# Altium PCB MIPI_To_HDMI.PcbDoc
Units mm, origin at the board's own origin, x right, y up, seen from the top; angles counter-clockwise.
Board outline 60 x 15 mm, 2 copper layers (Top Layer, Bottom Layer); 28 components, 27 nets, 132 pads, 38 vias.
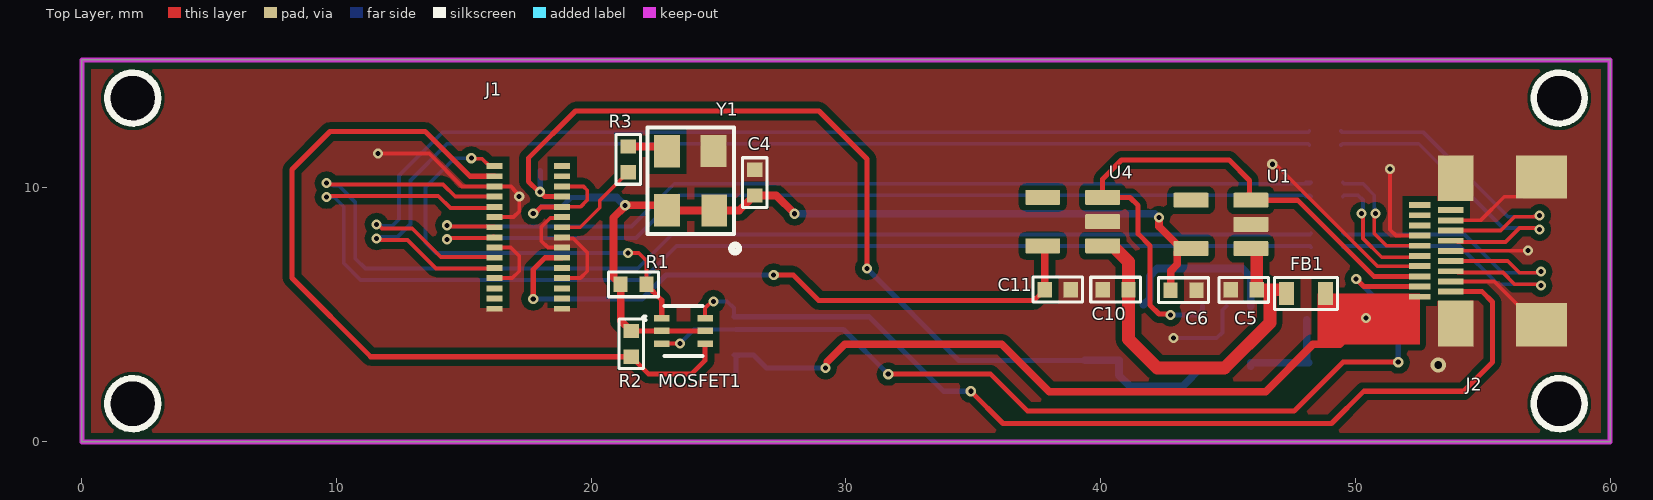
[diagram p0: Top Layer view]
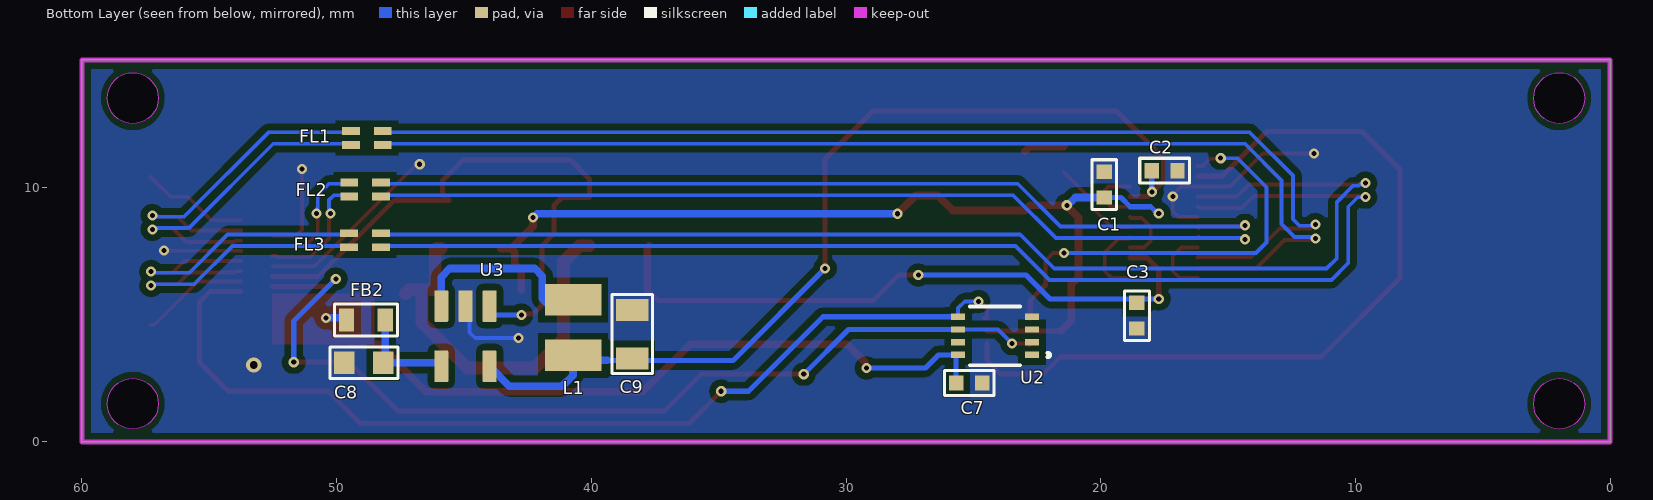
[diagram p1: Bottom Layer view, seen from below]
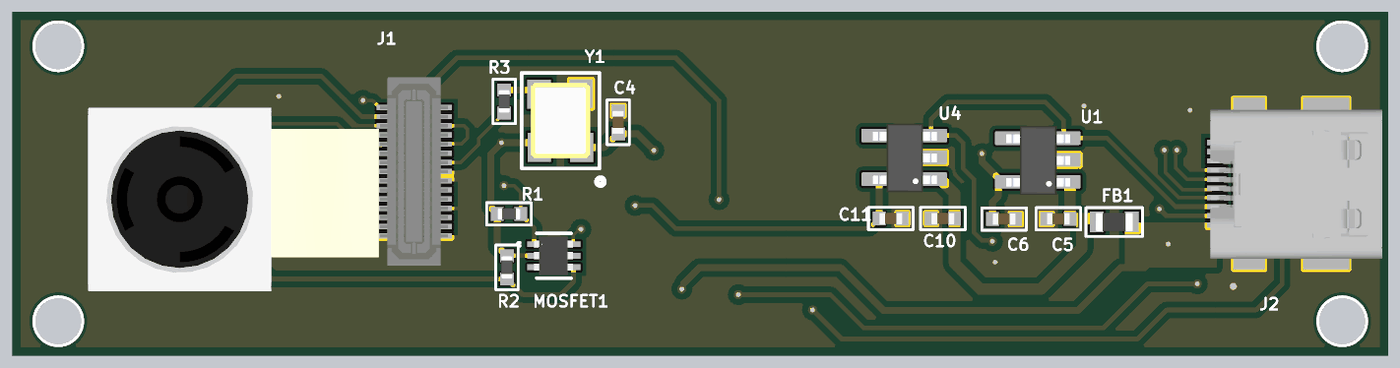
[diagram p2: 3D render of the assembled board from above, using the file's embedded part models]
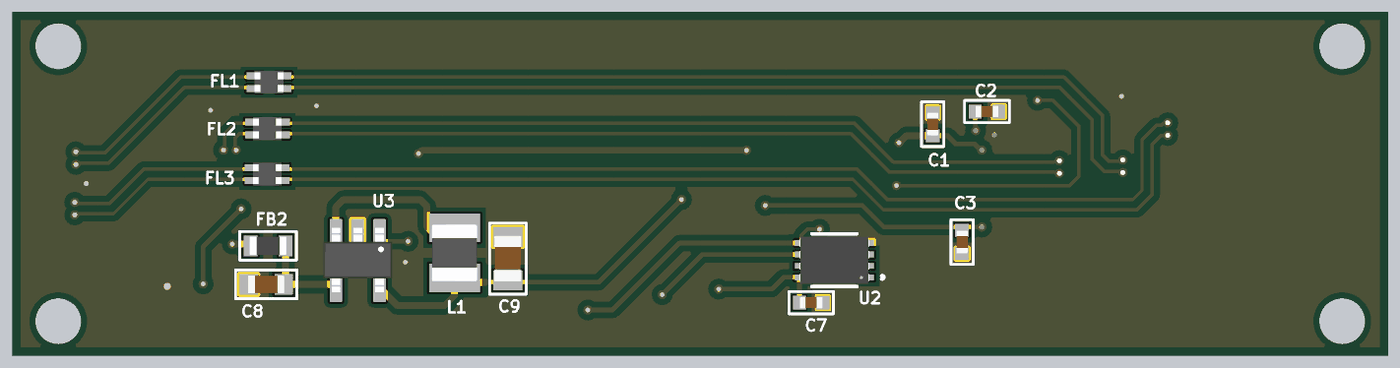
[diagram p3: 3D render of the assembled board from below, using the file's embedded part models]

## Layer stack, top to bottom
Top Solder: solder mask 0.0102, Solder Resist, Dk 3.5
Top Layer: signal copper 0.0356
Dielectric 1: dielectric 0.32, FR-4, Dk 4.8
Bottom Layer: signal copper 0.0356
Bottom Solder: solder mask 0.0102, Solder Resist, Dk 3.5

## Board outline
0,0 60,0 60,15 0,15
cut-out: 57,1.5 ccw(c58,1.5) 58,0.5 ccw(c58,1.5) 59,1.5 ccw(c58,1.5) 58,2.5 ccw(c58,1.5)
cut-out: 57,13.5 ccw(c58,13.5) 58,12.5 ccw(c58,13.5) 59,13.5 ccw(c58,13.5) 58,14.5 ccw(c58,13.5)
cut-out: 1,1.5 ccw(c2,1.5) 2,0.5 ccw(c2,1.5) 3,1.5 ccw(c2,1.5) 2,2.5 ccw(c2,1.5)
cut-out: 1,13.5 ccw(c2,13.5) 2,12.5 ccw(c2,13.5) 3,13.5 ccw(c2,13.5) 2,14.5 ccw(c2,13.5)

## Design rules (kind name [scope] priority, off if disabled: settings)
Clearance Clearance_1 [InPoly] p1: gap=0.254 ignorepadtopadclearanceinfootprint=TRUE
Clearance [All] p2: gap=0.15 ignorepadtopadclearanceinfootprint=TRUE
DiffPairsRouting [All] p1: maxlimit=1 minlimit=0.15 mostfreqgap=0.3 substack1={A68E8B82-1F49-4FB9-9444-1953C41FB96C} toplayer_{a68e8b82-1f49-4fb9-9444-1953c41fb96c}_prefgap=0.254 toplayer_{a68e8b82-1f49-4fb9-9444-1953c41fb96c}_minwidth=0.15 toplayer_{a68e8b82-1f49-4fb9-9444-1953c41fb96c}_maxwidth=0.381 toplayer_{a68e8b82-1f49-4fb9-9444-1953c41fb96c}_prefwidth=0.15 bottomlayer_{a68e8b82-1f49-4fb9-9444-1953c41fb96c}_prefgap=0.254 bottomlayer_{a68e8b82-1f49-4fb9-9444-1953c41fb96c}_minwidth=0.15 bottomlayer_{a68e8b82-1f49-4fb9-9444-1953c41fb96c}_maxwidth=0.381 bottomlayer_{a68e8b82-1f49-4fb9-9444-1953c41fb96c}_prefwidth=0.15 toplayer_minwidth=0.15 toplayer_maxwidth=0.381 toplayer_prefwidth=0.15 bottomlayer_minwidth=0.15 bottomlayer_maxwidth=0.381 bottomlayer_prefwidth=0.15 substack2={EB61043C-BB84-4B0D-A59E-0C1C5B324672} toplayer_{eb61043c-bb84-4b0d-a59e-0c1c5b324672}_mingap=0.254 toplayer_{eb61043c-bb84-4b0d-a59e-0c1c5b324672}_maxgap=0.254 toplayer_{eb61043c-bb84-4b0d-a59e-0c1c5b324672}_prefgap=0.254 toplayer_{eb61043c-bb84-4b0d-a59e-0c1c5b324672}_minwidth=0.15 toplayer_{eb61043c-bb84-4b0d-a59e-0c1c5b324672}_maxwidth=0.381 toplayer_{eb61043c-bb84-4b0d-a59e-0c1c5b324672}_prefwidth=0.2 bottomlayer_{eb61043c-bb84-4b0d-a59e-0c1c5b324672}_mingap=0.254 bottomlayer_{eb61043c-bb84-4b0d-a59e-0c1c5b324672}_maxgap=0.254 bottomlayer_{eb61043c-bb84-4b0d-a59e-0c1c5b324672}_prefgap=0.254 bottomlayer_{eb61043c-bb84-4b0d-a59e-0c1c5b324672}_minwidth=0.15 bottomlayer_{eb61043c-bb84-4b0d-a59e-0c1c5b324672}_maxwidth=0.381 bottomlayer_{eb61043c-bb84-4b0d-a59e-0c1c5b324672}_prefwidth=0.2 maxuncoupledlength=12.7
HoleSize [All] p1: absolutevalues=TRUE maxlimit=10 minlimit=0.025 maxpercent=80.000 minpercent=20.000
PolygonConnect [All] p1: connectstyle=Direct reliefconductorwidth=0.254 reliefentries=4 polygonreliefangle="90 Angle" airgapwidth=0.254
RoutingVias [All] p1: holewidth=0.2 width=0.4 viastyle="Through Hole" minholewidth=0.2 minwidth=0.4 maxholewidth=0.4 maxwidth=1
SolderMaskExpansion [All] p1: expansion=0.102
Width [All] p1: maxlimit=3 minlimit=0.15 preferedwidth=0.254
28 further rules are at their usual default settings.

## Classes and differential pairs
differential pair MIPI_D1: +MIPI_D1_P -MIPI_D1_N
differential pair MIPI_D0: +MIPI_D0_P -MIPI_D0_N
differential pair MIPI_CLK: +MIPI_CLK_P -MIPI_CLK_N
differential pair HDMI_MIPI_D1: +HDMI_MIPI_D1_P -HDMI_MIPI_D1_N
differential pair HDMI_MIPI_D0: +HDMI_MIPI_D0_P -HDMI_MIPI_D0_N
differential pair HDMI_MIPI_CLK: +HDMI_MIPI_CLK_P -HDMI_MIPI_CLK_N

## Components (designator, comment, footprint, x,y, rotation, side; value= is the part's Value field where it differs from the comment)
C1 "1uF" CAP-0402 19.86,9.594 r90 bottom
C2 "1uF" CAP-0402 18,10.65 r180 bottom
C3 "1uF" CAP-0402 18.58,5.466 r270 bottom
C4 "1uF" CAP-0402 26.42,9.674 r90 top
C5 "1uF" CAP-0402 46.126,5.97 r180 top
C6 "1uF" CAP-0402 42.744,5.96 r0 top
C7 "100nF" CAP-0402 25.67,2.31 r180 bottom
C8 "4.7uF" CAP-0603 48.93,3.11 r0 bottom
C9 "10uF" CAP-0805-S 38.392,4.232 r90 bottom
C10 "1uF" CAP-0402 41.092,5.98 r180 top
C11 "1uF" CAP-0402 37.804,5.98 r0 top
FB1 "BLM18AG601SN1" FBD-0603-S 48.06,5.83 r180 top
FB2 "BLM18AG601SN1" FBD-0603-S 48.85,4.79 r180 bottom
FL1 "DLP11SN900HL2L" DLP11SN900HL2L 48.81,11.93 r180 bottom
FL2 "DLP11SN900HL2L" DLP11SN900HL2L 48.88,9.91 r180 bottom
FL3 "DLP11SN900HL2L" DLP11SN900HL2L 48.887,7.918 r180 bottom
J1 "DF37NC30DS04V51" DF37NC30DS04V51 17.53,8.03 r90 top
J2 "Micro HDMI" HDMI-0467650301 55.35,7.5 r90 top
L1 "2.2uH" IND-1008 40.717,4.486 r270 bottom
MOSFET1 "DMG1024UV-7" SOT-563_DIO 23.594,4.24 r0 top
R1 "2.2K" RES-0402 21.15,6.185 r0 top
R2 "2.2K" RES-0402 21.57,4.359 r270 top
R3 "22R" RES-0402 21.45,11.6 r270 top
U1 "AP7331-18WG" AP7331-sot-25 44.721,8.54 r180 top
U2 "ATSHA204A-MAHCZ-" ATSHA204A 24.175,4.233 r0 bottom
U3 "PAM2301CAAB120" PAM2301CAAB120 44.94,4.15 r270 bottom
U4 "AP7331-28WG" AP7331-sot-25 38.901,8.65 r180 top
Y1 "24MHz" 3225-OSC 23.9,10.33 r90 top

## Footprints (in the part's own frame and the unit in brackets; to place one, negate y for a bottom-side part, rotate by r counter-clockwise, add the part's x,y. Pads: shape width x height; smd on the part's side, far side on the other; paste and mask are expansions set on the pad)
3225-OSC [mil]
  rect 50x40 smd: 1(-48.89,-36.56) 2(42.98,-35.31) 3(42.67,36.56) 4(-48.58,36.25)
  silkscreen extent -114,-74 79,67, body extent -68,-51 62,51, height 31
AP7331-sot-25 [mm]
  rrect15% 1.37x0.59 smd: 1(-1.175,0.95) 2(-1.175,0) 3(-1.175,-0.95) 4(1.175,-0.95) 5(1.175,0.95)
  body extent -1.42,-1.47 1.38,1.53, height 1.31
ATSHA204A [mil]
  rect 22x10 smd: 1(-58.06,32.24) 2(-58.06,12.56) 3(-58.06,-7.13) 4(-58.06,-26.81) 5(56.02,-26.81) 6(56.02,-7.13) 7(56.02,12.56) 8(56.02,32.24)
  silkscreen extent -86,-43 38,48, body extent -61,-37 59,43, height 19
CAP-0402 [mm]
  rect 0.56x0.6 smd mask+0.07: 1(0,0) 2(1.016,0)
  silkscreen extent -0.47,-0.49 1.48,0.49, body extent 0.01,-0.25 1.01,0.25, height 0.49
CAP-0603 [mm]
  rect 0.8x0.9 smd: 1(-0.762,0) 2(0.762,0)
  silkscreen extent -1.34,-0.63 1.34,0.63, body extent -0.8,-0.4 0.8,0.4, height 0.6
CAP-0805-S [mm]
  rect 0.862x1.27 smd: 1(-0.95,0) 2(0.95,0)
  silkscreen extent -1.55,-0.8 1.55,0.8, body extent -1,-0.6 1,0.6, height 0.95
DF37NC30DS04V51 [mm]
  rect 0.23x0.63 smd: 1(2.8,-1.325) 2(2.4,-1.325) 3(2,-1.325) 4(1.6,-1.325) 5(1.2,-1.325) 6(0.8,-1.325) 7(0.4,-1.325) 8(0,-1.325) 9(-0.4,-1.325) 10(-0.8,-1.325) 11(-1.2,-1.325) 12(-1.6,-1.325) 13(-2,-1.325) 14(-2.4,-1.325) 15(-2.8,-1.325) 16(-2.8,1.325) 17(-2.4,1.325) 18(-2,1.325) 19(-1.6,1.325) 20(-1.2,1.325) 21(-0.8,1.325) 22(-0.4,1.325) 23(0,1.325) 24(0.4,1.325) 25(0.8,1.325) 26(1.2,1.325) 27(1.6,1.325) 28(2,1.325) 29(2.4,1.325) 30(2.8,1.325)
  body extent -5.21,-1.75 10.65,14.23, height 6.76
DLP11SN900HL2L [mm]
  rect 0.7x0.3 smd: 1(-0.625,0.275) 2(0.625,0.275) 3(0.625,-0.275) 4(-0.625,-0.275)
  body extent -0.62,-0.5 0.63,0.5, height 0.93
FBD-0603-S [mm]
  rect 0.6x0.9 smd: 1(-0.762,0) 2(0.762,0)
  silkscreen extent -1.24,-0.63 1.24,0.63, body extent -0.8,-0.4 0.8,0.4, height 0.79
HDMI-0467650301 [mm]
  rect 0.23x0.85 smd: 1(1.8,2.825) 3(1.4,2.825) 5(1,2.825) 7(0.6,2.825) 9(0.2,2.825) 11(-0.2,2.825) 13(-0.6,2.825) 15(-1,2.825) 17(-1.4,2.825) 19(-1.8,2.825)
  rect 0.23x1 smd: 2(1.6,1.6) 4(1.2,1.6) 6(0.8,1.6) 8(0.4,1.6) 10(0,1.6) 12(-0.4,1.6) 14(-0.8,1.6) 16(-1.2,1.6) 18(-1.6,1.6)
  rect 1.8x1.38 smd: 20(-2.85,1.41) 21(2.85,1.41)
  rect 1.7x2 smd: 22(-2.9,-1.95) 23(2.9,-1.95)
  body extent -3.28,-4.4 3.22,3.1, height 2.98
IND-1008 [mm]
  rect 1.24x2.22 smd: 1(-1.09,0) 2(1.09,0)
  body extent -1.25,-1 1.25,1, height 0.99
PAM2301CAAB120 [mm]
  rrect14% 1.24x0.55 smd: 1(-1.185,0.95) 2(-1.185,0) 3(-1.185,-0.95) 4(1.185,-0.95) 5(1.185,0.95)
  body extent -1.42,-1.5 1.38,1.5, height 1.31
RES-0402 [mm]
  rect 0.56x0.6 smd mask+0.07: 1(0,0) 2(1.016,0)
  silkscreen extent -0.47,-0.49 1.48,0.49, body extent 0.01,-0.25 1.01,0.25, height 0.37
SOT-563_DIO [mil]
  rect 24x10 smd: 1(-32.56,24.37) 2(-32.56,4.68) 3(-32.56,-15) 4(34.44,-15) 5(34.44,4.68) 6(34.44,24.37)
  silkscreen extent -61,-34 30,43, body extent -34,-29 34,38, height 24

## Part data
C1 C2 C3 C4 C5 C6 C7 C8 C9 C10 C11: library part CAP, "Capacitor"
FB1 FB2 L1: library part INDUCTOR, "Inductor"
FL1 FL2 FL3: Package=FIL_DLP11SN900HL2L, DeviceSetName=DLP11SN900HL2L, Digi-Key_Part_Number=490-5143-1-ND, GateName_1=G$1, LibraryName=DLP11SN900HL2L, MF=Murata, Mouser-Purchase-URL=https://snapeda.com/shop?store=Mouser&id=4300514, MP=DLP11SN900HL2L, SymbolName_1=DLP11SN900HL2L
J2: library part HDMI-0467650301, Manufacturer_Name=Molex, Manufacturer_Part_Number=0467650301, Arrow_Part_Number=0467650301, Arrow_Price-Stock=https://www.arrow.com/en/products/0467650301/molex, DeviceSetName=0467650301, GateName_1=G$1, Height=3mm, LibraryName=0467650301, Package=0467650301, SymbolName_1=0467650301
R1 R2 R3: library part RES
U1 U4: library part AP7331-xxWG-7, Package=SOT95P285X145-5N, DeviceSetName=AP7331-18WG-7, Digi-Key_Part_Number=AP7331-18WG-7DICT-ND, GateName_1=G$1, LibraryName=AP7331-18WG-7, MF="Diodes Inc.", Mouser-Purchase-URL=https://snapeda.com/shop?store=Mouser&id=494406, MP=AP7331-18WG-7, SymbolName_1=AP7331-18WG-7
U2: Manufacturer_Part_Number=ATSHA204A-MAHCZ-T, Built_By=EMA_Molly, Copyright="Copyright (C) 2018 Accelerated Designs. All rights reserved", SourceLibrary=Microchip_2019-08-23_25, Vendor=Microchip
U3: Package=SOT95P280X100-5N, DeviceSetName=PAM2301CAAB120, Digi-Key_Part_Number=PAM2301CAAB120DI-ND, GateName_1=G$1, LibraryName=PAM2301CAAB120, MF="Diodes Inc.", MP=PAM2301CAAB120, SymbolName_1=PAM2301CAAB120
Y1: library part OSC-3225
MOSFET1: Built_By=EMA_Cory, C="Copyright (C) 2018 Accelerated Designs. All rights reserved", Copyright="Copyright (C) 2018 Accelerated Designs. All rights reserved", Datasheet=https://www.diodes.com/assets/Datasheets/ds31974.pdf, Manufacturer_Part_Number=DMG1024UV-7, SourceLibrary=Diodes_Inc_2020-03-09, Vendor="Diodes Inc"

## Via types
v1: diameter 0.4, hole 0.2, Top Layer to Bottom Layer, tented both sides, 37 vias
v2: diameter 0.6, hole 0.3, Top Layer to Bottom Layer, tented both sides, 1 vias

## Nets (pads, with @x,y where several pads share a name; then routed paths per layer and width w, separated by ;. In a path a pad name is that pad's centre, name@x,y a point inside that pad or via, vN(x,y) a via of type N, cw(c..) or ccw(c..) an arc to the next point about the centre after c; other vN are vias at no path point)
1V2: C2.1 C9.1 J1.4 L1.2 U3.5 | length 38.2
  Top Layer w0.2: J1.4 18.18,9.63 v1(17.99,9.82) 17.936,9.82 17.53,10.226 17.53,11.14 19.38,12.99 28.94,12.99 30.82,11.11 v1(30.82,6.81)
  Bottom Layer w0.2: v1(17.99,9.82) 17.995,9.825 17.995,10.645 C2.1 ; v1(30.82,6.81) 34.43,3.2 39.37,3.2
  Bottom Layer w0.3: 39.37,3.2 40.717,3.2 40.717,2.623 41.15,2.19 43.215,2.19 U3.5
1V8: C1.1 C4.1 C6.1 J1.3 J1.5 MOSFET1.2 MOSFET1.5 R1.1 R2.1 U1.5 Y1.1 Y1.4 | length 41.5
  Top Layer w0.15: J1.5 19.57,9.23 19.84,9.5 19.84,9.88 19.69,10.03 J1.3
  Top Layer w0.2: v1(17.72,8.97) 17.774,8.97 18.034,9.23 J1.5 ; R2.1 22.767,4.359 MOSFET1.5
  Top Layer w0.3: R2.1 21.55,4.359 21.15,4.759 R1.1 20.87,6.465 20.87,8.803 21.33,9.263 v1(21.33,9.29) 22.785,9.29 Y1.4 22.987,9.088 Y1.1 25.814,9.088 26.4,9.674 C4.1 27.266,9.674 v1(27.98,8.96) ; v1(42.286,8.815) 42.286,8.46 U1.5@43.156,7.59 ; C6.1 42.744,6.71 43.011,6.977 43.011,7.445 U1.5@43.156,7.59 ; U1.5 U1.5@43.156,7.59
  Bottom Layer w0.2: v1(17.72,8.97) 17.774,8.97 18.038,9.234 18.844,9.234 19.204,9.594 C1.1
  Bottom Layer w0.3: C1.1 20.999,9.594 21.303,9.29 v1(21.33,9.29) ; v1(27.98,8.96) 42.114,8.96 42.259,8.815 v1(42.286,8.815)
2V8: C3.1 C11.1 J1.10 U4.5 | length 25.3
  Top Layer w0.2: v1(17.72,5.613) 17.72,6.77 18.18,7.23 J1.10 ; v1(27.16,6.55) 27.93,6.55 28.93,5.55 37.374,5.55 37.604,5.78 37.624,5.78 37.804,5.96 C11.1
  Top Layer w0.3: U4.5 37.804,7.622 C11.1
  Bottom Layer w0.2: v1(17.72,5.613) 21.994,5.613 22.931,6.55 v1(27.16,6.55)
3V3: C7.1 FB1.1 FB2.1 J2.19 U2.8 | length 29
  Top Layer w0.3: 29.27,3.15 29.956,3.836 36.115,3.836 37.977,1.974 46.472,1.974 48.334,3.836 49.376,3.836 v1(50.41,4.87)
  Bottom Layer w0.2: U2.8 U2.8@25.674,3.414 ; C7.1@25.676,2.49 25.674,2.492 U2.8@25.674,3.414 ; U2.8@25.808,3.404 U2.8@25.81,3.402 ; v1(29.195,2.903) 26.879,2.903 26.368,3.414 25.808,3.414 U2.8@25.674,3.414
  Bottom Layer w0.3: FB2.1 49.692,4.87 v1(50.41,4.87)
ENABLE: J2.15 U1.3 U3.1 U4.3 | length 24.3
  Top Layer w0.2: v1(42.744,4.986) 42.706,5.024 42.286,5.024 41.939,5.371 41.939,7.7 41.47,8.169 41.47,9.28 41.15,9.6 U4.3 40.076,10.327 40.815,11.066 45.044,11.066 45.846,10.264 45.846,9.751 45.585,9.49 U1.3 47.733,9.49 50.723,6.5 J2.15
  Bottom Layer w0.2: v1(42.744,4.986) 43.815,4.986 43.99,5.161 U3.1
GND: C1.2 C2.2 C3.2 C4.2 C5.2 C6.2 C7.2 C8.2 C9.2 C10.2 C11.2 J1.6 J1.8 J1.9 J1.12 J1.15 J1.16 J1.19 J1.22 J1.25 J1.28 J2.4 J2.7 J2.10 J2.13 J2.16 J2.20 J2.21 J2.22 J2.23 U1.2 U2.4 U3.2 U4.2 Y1.2 | length 42
  Top Layer w0.15: v1(11.621,11.32) 13.638,11.32 14.928,10.03 J1.28 16.856,10.03 16.952,9.934 16.952,9.914 17.169,9.698 v1(17.169,9.63) 17.169,9.047 16.952,8.83 J1.25 ; J1.19 16.897,6.43 17.169,6.702 17.169,7.298 16.837,7.63 J1.22 ; J1.12 19.57,6.43 19.84,6.7 19.84,7.44 19.29,7.99 18.895,7.99 J1.8 ; J1.9 18.295,7.63 18.034,7.891 18.034,8.433 18.391,8.79 18.815,8.79 J1.6 ; v1(46.738,10.9) 46.86,10.9 50.86,6.9 J2.13 ; v1(51.36,10.71) 51.36,8.33 51.59,8.1 J2.7 ; J2.16 55.45,6.3 57.15,4.6 J2.22 ; J2.10 53.755,7.505 56.775,7.505 v1(56.78,7.51) ; J2.4 54.916,8.7 55.841,9.625 56.525,9.625 J2.23
  Bottom Layer w0.15: v1(42.861,4.079) 44.557,4.079 44.779,4.301 44.779,5.173 U3.2
  other v2: 53.25,3.021
HDMI_MIPI_CLK_N: FL3.4 J2.14 | length 12.2
  Top Layer w0.15: J2.14 53.979,6.7 54.029,6.65 55.791,6.65 56.251,6.19 57.067,6.19 57.069,6.188 57.232,6.188 v1(57.28,6.14)
  Bottom Layer w0.15: FL3.4 49.562,7.693 54.091,7.693 55.594,6.19 57.067,6.19 57.069,6.188 57.232,6.188 v1(57.28,6.14)
HDMI_MIPI_CLK_P: FL3.1 J2.12 | length 12.2
  Top Layer w0.15: J2.12 55.978,7.1 56.438,6.64 57.067,6.64 57.069,6.642 57.232,6.642 v1(57.28,6.69)
  Bottom Layer w0.15: FL3.1 49.562,8.143 54.277,8.143 55.78,6.64 57.067,6.64 57.069,6.642 57.232,6.642 v1(57.28,6.69)
HDMI_MIPI_D0_N: FL2.4 J2.11 | length 5
  Top Layer w0.15: v1(50.242,8.97) 50.29,8.922 50.29,8.817 50.292,8.815 50.292,7.992 51.034,7.25 52.321,7.25 52.371,7.3 J2.11
  Bottom Layer w0.15: FL2.4 49.555,9.685 50.106,9.685 50.292,9.499 50.292,9.183 50.29,9.181 50.29,9.018 v1(50.242,8.97)
HDMI_MIPI_D0_P: FL2.1 J2.9 | length 5
  Top Layer w0.15: v1(50.792,8.97) 50.744,8.922 50.744,8.817 50.742,8.815 50.742,8.178 51.22,7.7 51.999,7.7 J2.9
  Bottom Layer w0.15: FL2.1 49.555,10.135 50.292,10.135 50.742,9.685 50.742,9.183 50.744,9.181 50.744,9.018 v1(50.792,8.97)
HDMI_MIPI_D1_N: FL1.4 J2.8 | length 13
  Top Layer w0.15: J2.8 53.979,7.9 54.029,7.85 55.893,7.85 56.436,8.393 57.019,8.393 57.021,8.391 57.184,8.391 v1(57.232,8.343)
  Bottom Layer w0.15: FL1.4 49.485,11.705 52.489,11.705 55.8,8.393 57.019,8.393 57.021,8.391 57.184,8.391 v1(57.232,8.343)
HDMI_MIPI_D1_P: FL1.1 J2.6 | length 12.9
  Top Layer w0.15: J2.6 55.706,8.3 56.249,8.843 57.019,8.843 57.021,8.845 57.184,8.845 v1(57.232,8.893)
  Bottom Layer w0.15: FL1.1 49.485,12.155 52.675,12.155 55.987,8.843 57.019,8.843 57.021,8.845 57.184,8.845 v1(57.232,8.893)
MCLK: J1.7 R3.2 | length 3.7
  Top Layer w0.15: J1.7 19.565,8.43 20.33,9.195 20.33,9.484 21.43,10.584 R3.2
MIPI_CLK_N: FL3.3 J1.26 | length 48.7
  Top Layer w0.15: v1(9.61,9.61) 9.658,9.658 9.821,9.658 9.823,9.66 10.67,9.66 13.991,9.66 14.471,9.18 16.111,9.18 16.161,9.23 J1.26
  Bottom Layer w0.15: v1(9.61,9.61) 9.614,9.606 9.907,9.606 10.28,9.234 10.28,7.024 10.944,6.36 22.01,6.36 23.343,7.693 48.212,7.693 FL3.3
MIPI_CLK_P: FL3.2 J1.27 | length 48.7
  Top Layer w0.15: v1(9.61,10.16) 9.658,10.112 9.821,10.112 9.823,10.11 10.856,10.11 14.177,10.11 14.657,9.63 J1.27
  Bottom Layer w0.15: v1(9.61,10.16) 9.658,10.112 9.821,10.112 9.877,10.056 10.094,10.056 10.73,9.42 10.73,7.21 11.13,6.81 21.824,6.81 23.157,8.143 48.212,8.143 FL3.2
MIPI_D0_N: FL2.3 J1.23 | length 36.8
  Top Layer w0.15: v1(14.335,7.955) 14.383,8.003 14.546,8.003 14.548,8.005 14.768,8.005 16.18,8.005 J1.23 J1.23@16.165,8.07
  Bottom Layer w0.15: v1(14.335,7.955) 14.383,8.003 14.546,8.003 14.548,8.005 21.761,8.005 23.441,9.685 48.205,9.685 FL2.3 FL2.3@48.055,9.635
MIPI_D0_P: FL2.2 J1.24 | length 36.8
  Top Layer w0.15: v1(14.335,8.505) 14.383,8.457 14.546,8.457 14.548,8.455 14.954,8.455 16.18,8.455 J1.24 J1.24@16.165,8.39
  Bottom Layer w0.15: v1(14.335,8.505) 14.383,8.457 14.546,8.457 14.548,8.455 21.574,8.455 23.254,10.135 48.205,10.135 FL2.2 FL2.2@48.055,10.185
MIPI_D1_N: FL1.3 J1.20 | length 44.4
  Top Layer w0.15: v1@11.486,7.906 11.506,7.926 12.783,7.926 13.904,6.805 16.18,6.805 J1.20
  Bottom Layer w0.15: v1(11.57,7.99) 11.62,8.04 12.386,8.04 12.9,8.554 12.9,10.27 14.335,11.705 47.61,11.705 48.135,11.705 FL1.3
MIPI_D1_P: FL1.2 J1.21 | length 44.4
  Top Layer w0.15: v1(11.57,8.54) 11.621,8.54 11.785,8.376 12.969,8.376 14.09,7.255 16.18,7.255 J1.21
  Bottom Layer w0.15: v1(11.57,8.54) 11.62,8.54 11.67,8.49 12.2,8.49 12.45,8.74 12.45,10.456 14.149,12.155 47.423,12.155 48.135,12.155 FL1.2
NetC5_1: C5.1 C10.1 FB1.2 U1.1 U4.1 | length 15.4
  Top Layer w0.5: U4.1 40.466,7.7 41.092,7.074 C10.1 41.092,4.03 42.219,2.903 44.864,2.903 46.642,4.68 46.642,5.97 ; U1.1 46.081,7.59 46.126,7.545 C5.1 46.642,5.97 ; FB1.2 47.158,5.97 46.642,5.97
NetC8_1: C8.1 FB2.2 U3.4 | length 4.1
  Bottom Layer w0.3: U3.4 45.89,3.11 C8.1@48.088,3.11 ; FB2.2 C8.1@48.088,3.11 ; C8.1 C8.1@48.088,3.11
NetL1_1: L1.1 U3.3 | length 6.6
  Bottom Layer w0.3: L1.1@41.68,5.39 41.92,5.63 41.92,6.506 42.224,6.81 45.552,6.81 45.89,6.472 U3.3
NetR3_1: R3.1 Y1.3 | length 1.6
  Top Layer w0.3: R3.1 22.785,11.6 Y1.3
SCL: J2.17 MOSFET1.3 U2.6 | length 37.8
  Top Layer w0.15: MOSFET1.3 v1(23.479,3.859)
  Top Layer w0.2: MOSFET1.3 MOSFET1.3@22.794,3.832 ; v1(31.66,2.66) 35.68,2.66 37.131,1.208 47.593,1.208 49.516,3.131 v1(51.68,3.131) ; v1(50.03,6.4) 50.33,6.1 J2.17
  Bottom Layer w0.15: v1(23.479,3.859) 24.034,4.414 U2.6
  Bottom Layer w0.2: U2.6@25.673,4.414 29.906,4.414 v1(31.66,2.66) ; v1(50.03,6.4) 51.68,4.75 v1(51.68,3.131)
SCL_1V8: J1.29 MOSFET1.4 R2.2 | length 32.2
  Top Layer w0.2: J1.29 15.239,10.43 13.479,12.19 9.74,12.19 8.25,10.7 8.25,6.432 11.338,3.343 R2.2 22.253,2.66 23.922,2.66 24.469,3.208 MOSFET1.4
SDA: J2.18 MOSFET1.6 U2.5 | length 38.8
  Top Layer w0.15: MOSFET1.6 24.469,5.255 24.729,5.515 v1(24.797,5.515)
  Top Layer w0.2: MOSFET1.6 MOSFET1.6@24.559,4.859 ; v1(34.9,1.99) 36.167,0.723 49.063,0.723 50.33,1.99 54.24,1.99 55.381,3.131 55.381,5.494 54.975,5.9 J2.18
  Bottom Layer w0.15: v1(24.797,5.515) 25.336,5.515 25.598,5.253 U2.5
  Bottom Layer w0.2: U2.5 30.906,4.914 33.83,1.99 v1(34.9,1.99)
SDA_1V8: J1.30 MOSFET1.1 R1.2 | length 17
  Top Layer w0.15: v1(15.29,11.14) 15.31,11.12 15.715,11.12 16.005,10.83 J1.30 ; v1(21.44,7.42) 21.444,7.416 21.865,7.416 22.166,7.115 R1.2
  Top Layer w0.2: R1.2 22.166,6.165 22.767,5.564 MOSFET1.1
  Bottom Layer w0.15: v1(15.29,11.14) 14.63,11.14 13.49,10 13.49,7.83 13.9,7.42 v1(21.44,7.42)
pads on no net: J1.1 J1.2 J1.11 J1.13 J1.14 J1.17 J1.18 J2.1 J2.2 J2.3 J2.5 U1.4 U2.1 U2.2 U2.3 U2.7 U4.4

## Polygon pours and split planes (outlines as drawn)
GND on Bottom Layer "GND_L02_P008" (solid, remove dead copper, pour order 8): 0,0 0,15 60,15 60,0
GND on Top Layer "GND_L01_P012" (solid, remove dead copper, pour order 12): 0,0 0,15 60,15 60,0
GND on Top Layer "GND_L01_P010" (solid, remove dead copper, pour order 10): 0.009,0
no net on Layer0 "Default Coverlay 2 Top" (split plane): 0,0 60,0 60,15 0,15
no net on Layer0 "Default Coverlay 2 Bottom" (split plane): 0,0 60,0 60,15 0,15

## Keep-outs
Keep-Out Layer:
  the board outline again, w0.2

## Other copper
Top Layer:
  region net 3V3: 52.525,5.815 48.522,5.815 48.522,3.83 52.525,3.83

## Silkscreen, mask and mechanical layers (free items; w line width, h text height)
Top Overlay:
  circle w0.254: c58,1.5 r1
  circle w0.254: c58,13.5 r1
  circle w0.254: c2,1.5 r1
  circle w0.254: c2,13.5 r1